# EAGLE board Voting Machine (EAGLE 7.6.0)

Size 73.58 x 76.09 mm. Coordinates in mm from the lower left corner, seen from the top.
Outline: 0,0 56.82,0 56.82,53.33 0,53.33 0,0
Copper layers (1*16): Top 0.035mm / dielectric 1.5mm / Bottom 0.035mm
Design rules "default": minimum track width 10mil, minimum drill 24mil, track to track 8mil, track to pad 8mil, pad to pad 8mil, via to via 8mil, smd to smd 8mil, copper to edge 40mil, drill to drill 8mil, minimum pad ring 10mil, minimum via ring 8mil, stop-mask expansion 4mil, vias tented up to drill 0mil, thermal gap 10mil

## Footprints (pad centres in the part's own frame; a part is rotated, then mirrored left to right if it is on the bottom)
LED5MM = drill 0.813 octagon: A -1.27,0; K 1.27,0
0207/10 = drill 0.813 octagon: 1 -5.08,0; 2 5.08,0
TL1105 = drill 1 pad 1.676: 1 -2.25,3.25; 2 2.25,3.25; 3 -2.25,-3.25; 4 2.25,-3.25
DIP04YL = drill 0.813 long: 1 -3.81,-3.81; 2 -1.27,-3.81; 3 1.27,-3.81; 4 3.81,-3.81; 5 3.81,3.81; 6 1.27,3.81; 7 -1.27,3.81; 8 -3.81,3.81
ARDUINO_UNO = drill 1.016 pad 1.88: 0 63.5,50.8; 1 60.96,50.8; 2 58.42,50.8; 3 55.88,50.8; 3.3V 35.56,2.54; 4 53.34,50.8; 5 50.8,50.8; 5V 38.1,2.54; 6 48.26,50.8; 7 45.72,50.8; 8 41.656,50.8; 9 39.116,50.8; 10 36.576,50.8; 11 34.036,50.8; 12 31.496,50.8; 13 28.956,50.8; A0 50.8,2.54; A1 53.34,2.54; A2 55.88,2.54; A3 58.42,2.54; A4 60.96,2.54; A5 63.5,2.54; AREF 23.876,50.8; GND 26.416,50.8; GND. 43.18,2.54; GND.. 40.64,2.54; I/OREF 30.48,2.54; N/C 27.94,2.54; RESET 33.02,2.54; SCL 18.796,50.8; SDA 21.336,50.8; VIN 45.72,2.54 | hole 3.2: 66.04,7.62; 66.04,35.56; 15.24,50.8; 13.97,2.54

## Placement (x,y rotation side)
D1  [LED5MM]  5,365.68 0 top  (outside the outline)
D2  [LED5MM]  5,137.08 0 top  (outside the outline)
D3  [LED5MM]  5,149.78 0 top  (outside the outline)
D4  [LED5MM]  5,162.48 0 top  (outside the outline)
D5  [LED5MM]  5,175.18 0 top  (outside the outline)
D8  [LED5MM]  5,238.68 0 top  (outside the outline)
D9  [LED5MM]  5,251.38 0 top  (outside the outline)
D10  [LED5MM]  5,264.08 0 top  (outside the outline)
D11  [LED5MM]  5,276.78 0 top  (outside the outline)
D12  [LED5MM]  5,416.48 0 top  (outside the outline)
D13  [LED5MM]  5,429.18 0 top  (outside the outline)
D14  [LED5MM]  5,479.98 0 top  (outside the outline)
R1  1k‎Ω  [0207/10]  5,35.48 0 top
R2  1k‎Ω  [0207/10]  5,73.58 0 top
R3  1k‎Ω  [0207/10]  5,98.98 0 top  (outside the outline)
R4  1k‎Ω  [0207/10]  5,124.38 0 top  (outside the outline)
R5  220‎Ω  [0207/10]  5,441.88 0 top  (outside the outline)
R6  220‎Ω  [0207/10]  5,454.58 0 top  (outside the outline)
R7  220‎Ω  [0207/10]  5,187.88 0 top  (outside the outline)
R8  220‎Ω  [0207/10]  5,200.58 0 top  (outside the outline)
R9  220‎Ω  [0207/10]  5,213.28 0 top  (outside the outline)
R10  220‎Ω  [0207/10]  5,225.98 0 top  (outside the outline)
R11  220‎Ω  [0207/10]  5,467.28 0 top  (outside the outline)
R12  1k‎Ω  [0207/10]  5,505.38 0 top  (outside the outline)
R13  220‎Ω  [0207/10]  5,378.38 0 top  (outside the outline)
R14  220‎Ω  [0207/10]  5,289.48 0 top  (outside the outline)
R15  220‎Ω  [0207/10]  5,302.18 0 top  (outside the outline)
R16  220‎Ω  [0207/10]  5,314.88 0 top  (outside the outline)
R17  220‎Ω  [0207/10]  5,327.58 0 top  (outside the outline)
R18  1k‎Ω  [0207/10]  5,352.98 0 top  (outside the outline)
R19  1k‎Ω  [0207/10]  5,518.08 0 top  (outside the outline)
R20  1k‎Ω  [0207/10]  5,530.78 0 top  (outside the outline)
R21  1k‎Ω  [0207/10]  5,543.48 0 top  (outside the outline)
R22  1k‎Ω  [0207/10]  5,568.88 0 top  (outside the outline)
S1  [TL1105]  5,48.18 0 top
S2  [TL1105]  5,60.88 0 top
S3  [TL1105]  5,86.28 0 top  (outside the outline)
S4  [TL1105]  5,111.68 0 top  (outside the outline)
S5  [TL1105]  5,391.08 0 top  (outside the outline)
S6  [TL1105]  5,403.78 0 top  (outside the outline)
S7  [TL1105]  5,556.18 0 top  (outside the outline)
S8  [TL1105]  5,340.28 0 top  (outside the outline)
SW2  [DIP04YL]  5,492.68 0 top  (outside the outline)
U1  [ARDUINO_UNO]  5,10.08 0 top
U2  [ARDUINO_UNO]  5,22.78 0 top

## Library data of the parts
D1-D5 D8-D14 R1-R22 S1-S8 SW2 U1 U2 = AUTODESK_CIRCUITS_BREADBOARD

## Nets
N$1: U1.GND. U2.GND.
N$2: R1.1 R2.1 R4.1 R7.1 R8.1 R9.1 R10.1 R13.1 U1.GND..
N$3: U1.1 U2.0
N$4: U1.0 U2.1
N$5: R1.2 S1.3 U1.7
N$6: S1.2
N$7: S1.1
N$8: S2.2
N$9: S2.1
N$10: R2.2 S2.3 U1.6
N$11: S3.2
N$12: S3.1
N$13: R3.2 S3.3 U1.5
N$14: S4.2
N$15: S4.1
N$16: R4.2 S4.3 U1.4
N$17: S1.4 S2.4 S3.4 S4.4 U1.5V
N$18: D2.K R7.2
N$19: D3.K R8.2
N$20: D4.K R9.2
N$21: D5.K R10.2
N$22: D2.A U1.8
N$23: D3.A U1.9
N$24: D4.A U1.10
N$25: D5.A U1.11
N$26: R5.1 R6.1 R11.1 R14.1 R15.1 R16.1 R17.1 R18.1 R22.1 U2.GND..
N$27: D9.K R14.2
N$28: D9.A U2.12
N$29: D8.K R15.2
N$30: D8.A U2.13
N$31: D10.K R17.2
N$32: D10.A U2.11
N$33: D11.K R16.2
N$34: D11.A U2.10
N$35: D1.A U1.A0
N$36: D1.K R13.2
N$37: S6.2
N$38: S6.1
N$39: D13.A S6.3 U2.3
N$40: S5.2
N$41: S5.1
N$42: D12.A S5.3 U2.2
N$43: D12.K R6.2
N$44: D13.K R5.2
N$45: D14.K R11.2
N$46: D14.A U2.9
N$47: SW2.5 U2.7
N$48: SW2.6 U2.6
N$49: SW2.7 U2.5
N$50: SW2.8 U2.4
N$51: R12.2 SW2.1
N$52: R19.2 SW2.2
N$53: R20.2 SW2.3
N$54: R21.2 SW2.4
N$55: S8.2
N$56: S8.1
N$57: R12.1 R19.1 R20.1 R21.1 S5.4 S6.4 S7.4 S8.4 U2.5V
N$58: S7.2
N$59: S7.1
N$60: R22.2 S7.3 U2.A0
N$61: R18.2 S8.3 U2.8

## Tracks (layer width: path | path; a pad name or v marks a point on that pad's centre or on a via)
N$1  (1 unrouted)
N$2  (8 unrouted)
N$3  (1 unrouted)
N$4  (1 unrouted)
N$5  (2 unrouted)
N$10  (2 unrouted)
N$13  (2 unrouted)
N$16  (2 unrouted)
N$17  (4 unrouted)
N$18  (1 unrouted)
N$19  (1 unrouted)
N$20  (1 unrouted)
N$21  (1 unrouted)
N$22  (1 unrouted)
N$23  (1 unrouted)
N$24  (1 unrouted)
N$25  (1 unrouted)
N$26  (9 unrouted)
N$27  (1 unrouted)
N$28  (1 unrouted)
N$29  (1 unrouted)
N$30  (1 unrouted)
N$31  (1 unrouted)
N$32  (1 unrouted)
N$33  (1 unrouted)
N$34  (1 unrouted)
N$35  (1 unrouted)
N$36  (1 unrouted)
N$39  (2 unrouted)
N$42  (2 unrouted)
N$43  (1 unrouted)
N$44  (1 unrouted)
N$45  (1 unrouted)
N$46  (1 unrouted)
N$47  (1 unrouted)
N$48  (1 unrouted)
N$49  (1 unrouted)
N$50  (1 unrouted)
N$51  (1 unrouted)
N$52  (1 unrouted)
N$53  (1 unrouted)
N$54  (1 unrouted)
N$57  (8 unrouted)
N$60  (2 unrouted)
N$61  (2 unrouted)